# EAGLE board ledboard (EAGLE 6.5.0)
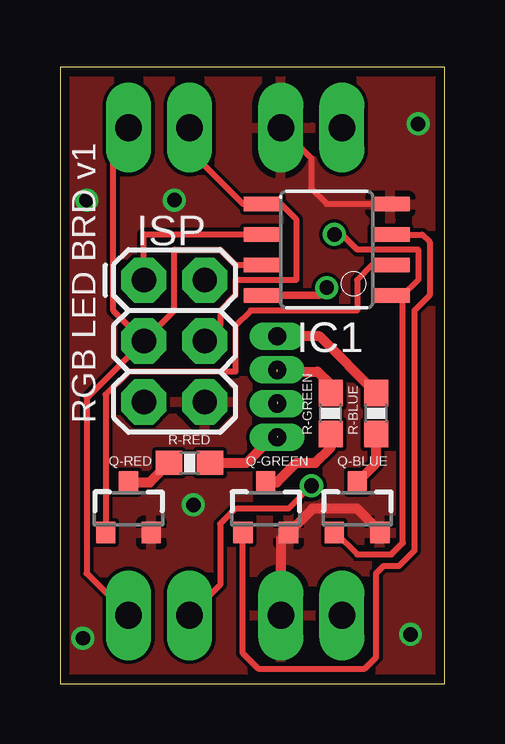
[diagram p0: board, top side]
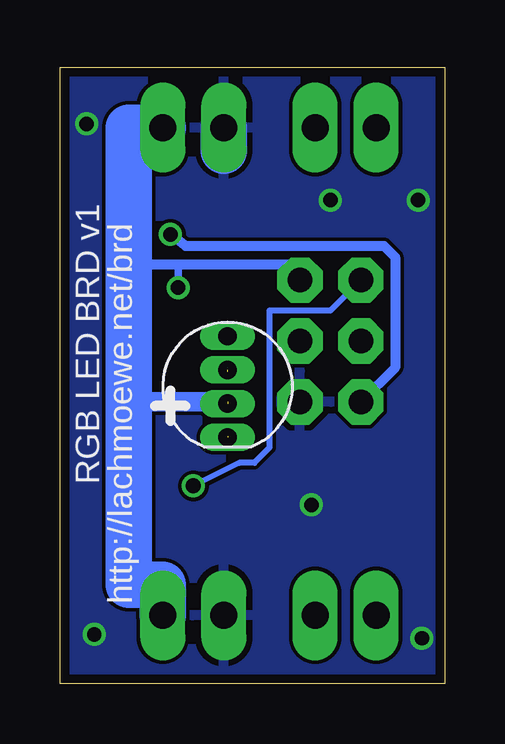
[diagram p1: board, bottom side, seen from below]

Size 16.03 x 25.7 mm. Coordinates in mm from the lower left corner, seen from the top.
Outline: 0,0 16.03,0 16.03,25.7 0,25.7 0,0
Copper layers (1*16): Top 0.0356mm / dielectric 1.5011mm / Bottom 0.0356mm
Design rules "OSHpark": minimum track width 6mil, minimum drill 13mil, track to track 6mil, track to pad 6mil, pad to pad 6mil, via to via 6mil, smd to smd 6mil, copper to edge 15mil, drill to drill 6mil, minimum pad ring 7mil, minimum via ring 7mil, stop-mask expansion 3mil, vias tented up to drill 0mil, thermal gap 10mil

## Footprints (pad centres in the part's own frame; a part is rotated, then mirrored left to right if it is on the bottom)
1X02_LONGPADS = drill 1.118 pad 1.88 long: 1 0,0; 2 2.54,0
LED-RGB-THRU = drill 0.762 pad 0.889 long: 1 2.1,0; 2 0.7,0; 3 -0.7,0; 4 -2.1,0
8S1 = smd 0.6 x 1.6: 1 -1.905,-2.654; 2 -0.645,-2.654; 3 0.625,-2.654; 4 1.895,-2.654; 5 1.905,2.654; 6 0.635,2.654; 7 -0.635,2.654; 8 -1.905,2.654
2X3 = drill 1.016 pad 1.88 octagon: 1 0,0; 2 0,2.54; 3 2.54,0; 4 2.54,2.54; 5 5.08,0; 6 5.08,2.54
SOT23-3 = smd 0.8 x 0.9: 1 -0.95,-1; 2 0.95,-1; 3 0,1.1
0603-RES = smd 1.1 x 1: 1 -0.85,0; 2 0.85,0

## Placement (x,y rotation side)
COM-IN  M02PTH3  [1X02_LONGPADS]  2.86,2.86 0 top
COM-OUT  M02PTH3  [1X02_LONGPADS]  2.86,23.18 0 top
D1  LED-RGB-CA-THRUCLEAR  [LED-RGB-THRU]  9.05,12.38 270 bottom
IC1  TINY13-20SSU  [8S1]  11.11,18.1 90 top
ISP  [2X3]  3.49,16.83 270 top
POWER  M02PTH3  [1X02_LONGPADS]  9.21,2.86 0 top
POWER1  M02PTH3  [1X02_LONGPADS]  9.21,23.18 0 top
Q-BLUE  30V, 2.5A  [SOT23-3]  12.38,7.3 0 top
Q-GREEN  30V, 2.5A  [SOT23-3]  8.57,7.3 0 top
Q-RED  30V, 2.5A  [SOT23-3]  2.86,7.3 0 top
R-BLUE  [0603-RES]  13.18,11.27 90 top
R-GREEN  [0603-RES]  11.27,11.27 90 top
R-RED  [0603-RES]  5.4,9.21 0 top

## Library data of the parts
COM-IN COM-OUT ISP POWER POWER1 = SparkFun-Connectors
D1 = SparkFun-LED; PROD_ID: DIO-10631
IC1 = atmel; MPN: ATTINY13-20SSU; OC_FARNELL: 1455133; OC_NEWARK: 58M3771
Q-BLUE Q-GREEN Q-RED = SparkFun-DiscreteSemi; PROD_ID: TRANS-11308
R-BLUE R-GREEN R-RED = SparkFun-Resistors

## Nets
GND: IC1.4 ISP.6 POWER1.1 POWER.1 Q-BLUE.2 Q-GREEN.2 Q-RED.2
GREEN: IC1.3 Q-GREEN.1
MISO: COM-IN.2 IC1.6 ISP.1
MOSI: COM-OUT.2 IC1.5 ISP.4
N$1: D1.1 R-RED.2
N$2: Q-RED.3 R-RED.1
N$3: D1.4 R-BLUE.2
N$4: D1.3 R-GREEN.2
N$5: Q-GREEN.3 R-GREEN.1
N$6: Q-BLUE.3 R-BLUE.1
RED: IC1.2 Q-RED.1
RST: IC1.1 ISP.5 Q-BLUE.1
SCK: COM-IN.1 COM-OUT.1 IC1.7 ISP.3
VCC: D1.2 IC1.8 ISP.2 POWER1.2 POWER.2

## Tracks (layer width: path | path; a pad name or v marks a point on that pad's centre or on a via)
GND  (via drill 0.6)
  Top 0.254: 9.21,6.03 Q-GREEN.2 | POWER1.1 10.48,21.91 10.48,20.64 11.11,20 13.65,20 IC1.4
  Top 0.406: Q-BLUE.2 13.33,6.35 12.38,7.3 10.52,7.3 Q-GREEN.2 | 9.21,6.03 POWER.1
  Bottom 1.93: POWER1.1 9.21,22.23
  other vias: 4.76,20.16 1.11,20.16 0.95,1.91 14.61,2.06 14.92,23.34 5.56,7.46
  pour Bottom: -1.43,26.35 17.14,26.35 17.14,-0.79 -1.43,-0.79
  pour Top: -1.27,26.19 16.99,26.19 16.99,-0.64 -1.27,-0.64
GREEN
  Top 0.254: IC1.3 15.09,18.72 15.4,18.41 15.4,16.19 14.76,15.56 14.76,5.56 14.13,4.92 13.49,4.92 13.18,4.6 13.18,1.11 12.7,0.64 8.26,0.64 7.62,1.27 Q-GREEN.1
MISO  (via drill 0.61)
  Top 0.254: IC1.6 3.49,18.73 ISP.1 | COM-IN.2 6.67,4.13 6.67,6.67 7.3,7.3 9.53,7.3 v10.48,8.26
  Bottom 0.254: v10.48,8.26 8.57,9.21 7.94,9.21 7.3,9.84 7.3,15.56 4.76,15.56 ISP.1
MOSI
  Top 0.254: COM-OUT.2 5.4,22.23 7.62,20 IC1.5 9.21,20 9.84,19.37 9.84,16.83 7.3,16.83 7.3,16.19 6.67,15.56 6.67,14.92 ISP.4
N$1  (1 unrouted)
  Top 0.406: R-RED.2 7.78,9.21 8.89,10.32 9.05,10.32
N$2
  Top 0.406: Q-RED.3 3.74,8.4 R-RED.1
N$3
  Top 0.406: 9.37,14.29 9.17,14.48 D1.4 10.81,14.48 R-BLUE.2
N$4  (1 unrouted)
  Top 0.406: 9.05,13.02 10.74,13.02 11.27,12.48 R-GREEN.2
N$5
  Top 0.406: Q-GREEN.3 9.04,8.4 9.84,9.21 10.64,9.21 11.27,9.84 11.06,10.26 11.06,10.42 R-GREEN.1
N$6
  Top 0.406: Q-BLUE.3 13.18,9.2 R-BLUE.1
RED
  Top 0.254: Q-RED.1 1.91,6.67 1.91,12.06 2.86,13.02 7.3,13.02 7.3,14.92 7.94,15.56 12.38,15.56 12.38,16.83 13.02,17.46 13.65,17.46 IC1.2
RST  (via drill 0.6)
  Top 0.152: 14.29,16.19 IC1.1
  Top 0.254: Q-BLUE.1 11.48,6.3 12.38,5.4 13.81,5.4 14.29,5.87 14.29,16.19 14.92,16.83 14.92,18.1 12.38,18.1 11.75,18.73 v11.43,18.73
  Bottom 0.406: v11.43,18.73 10.79,18.26 2.54,18.26 2.06,17.78 2.06,13.18 ISP.5
S$1
  Top 0.406: 9.21,14.29 9.05,14.29 9.05,14.45
SCK
  Top 0.254: IC1.7 7.3,17.46 6.67,18.1 4.76,18.1 4.76,15.56 ISP.3 | COM-IN.1 1.11,4.6 1.11,11.91 ISP.3 | COM-OUT.1 2.22,22.54 2.22,15.56 ISP.3
VCC  (via drill 0.6)  (1 unrouted)
  Top 0.305: IC1.8 10.79,16.19 v11.11,16.51
  Bottom 0.305: v11.11,16.51 11.11,17.46
  Bottom 0.406: ISP.2 6.03,17.14 6.35,17.46 11.11,17.46 13.18,17.46
  Bottom 0.813: 9.05,11.75 13.18,11.75
  Bottom 1.93: POWER1.2 13.18,23.18 13.18,17.46 13.18,11.75 13.18,4.13 11.75,4.13 POWER.2

## Text on the board
tNames: RGB LED BRD v1
bNames: RGB LED BRD v1 | http://lachmoewe.net/brd